# EAGLE board CT_schematic (EAGLE 7.6.0)

Size 100 x 80 mm. Coordinates in mm from the lower left corner, seen from the top.
Outline: 0,0 100,0 100,80 0,80 0,0
Copper layers (1*16): Top 0.035mm / dielectric 1.5mm / Bottom 0.035mm
Design rules "default": minimum track width 10mil, minimum drill 24mil, track to track 8mil, track to pad 8mil, pad to pad 8mil, via to via 8mil, smd to smd 8mil, copper to edge 40mil, drill to drill 8mil, minimum pad ring 10mil, minimum via ring 8mil, stop-mask expansion 4mil, vias tented up to drill 0mil, thermal gap 10mil

## Footprints (pad centres in the part's own frame; a part is rotated, then mirrored left to right if it is on the bottom)
C0603 = smd 0.8 x 0.8: 1 -0.762,0; 2 0.762,0
C0402 = smd 0.5 x 0.5: 1 -0.508,0; 2 0.508,0
C0805 = smd 1.2 x 1.3: 1 -1.016,0; 2 1.016,0
C1206 = smd 1.3 x 1.6: 1 -1.524,0; 2 1.524,0
L0603 = smd 0.8 x 0.8: 1 -0.762,0; 2 0.762,0
L1210 = smd 1.2 x 2.5: 1 -1.524,0; 2 1.524,0
L0805 = smd 1.2 x 1.3: 1 -1.016,0; 2 1.016,0
R0603 = smd 0.8 x 0.8: 1 -0.762,0; 2 0.762,0
LQFP48 = smd 0.3 x 1.2: 1 -2.75,-4.25; 2 -2.25,-4.25; 3 -1.75,-4.25; 4 -1.25,-4.25; 5 -0.75,-4.25; 6 -0.25,-4.25; 7 0.25,-4.25; 8 0.75,-4.25; 9 1.25,-4.25; 10 1.75,-4.25; 11 2.25,-4.25; 12 2.75,-4.25; 25 2.75,4.25; 26 2.25,4.25; 27 1.75,4.25; 28 1.25,4.25; 29 0.75,4.25; 30 0.25,4.25; 31 -0.25,4.25; 32 -0.75,4.25; 33 -1.25,4.25; 34 -1.75,4.25; 35 -2.25,4.25; 36 -2.75,4.25 | smd 1.2 x 0.3: 13 4.25,-2.75; 14 4.25,-2.25; 15 4.25,-1.75; 16 4.25,-1.25; 17 4.25,-0.75; 18 4.25,-0.25; 19 4.25,0.25; 20 4.25,0.75; 21 4.25,1.25; 22 4.25,1.75; 23 4.25,2.25; 24 4.25,2.75; 37 -4.25,2.75; 38 -4.25,2.25; 39 -4.25,1.75; 40 -4.25,1.25; 41 -4.25,0.75; 42 -4.25,0.25; 43 -4.25,-0.25; 44 -4.25,-0.75; 45 -4.25,-1.25; 46 -4.25,-1.75; 47 -4.25,-2.25; 48 -4.25,-2.75
SOIC-8 = smd 1.6 x 0.6: 1 -2.7,1.905 | smd 1.55 x 0.6: 2 -2.7,0.635; 3 -2.7,-0.635; 4 -2.7,-1.905; 5 2.7,-1.905; 6 2.7,-0.635; 7 2.7,0.635; 8 2.7,1.905
SSOP-20 = smd 1.651 x 0.432: 1 -3.48,2.925; 2 -3.48,2.275; 3 -3.48,1.625; 4 -3.48,0.975; 5 -3.48,0.325; 6 -3.48,-0.325; 7 -3.48,-0.975; 8 -3.48,-1.625; 9 -3.48,-2.275; 10 -3.48,-2.925; 11 3.48,-2.925; 12 3.48,-2.275; 13 3.48,-1.625; 14 3.48,-0.975; 15 3.48,-0.325; 16 3.48,0.325; 17 3.48,0.975; 18 3.48,1.625; 19 3.48,2.275; 20 3.48,2.925
HTSS-105-01-G-D = drill 1 pad 1.8 square: 1 0,0 | drill 1 pad 1.8: 2 0,2.54; 3 2.54,0; 4 2.54,2.54; 5 5.08,0; 6 5.08,2.54; 7 7.62,0; 8 7.62,2.54; 9 10.16,0; 10 10.16,2.54
FCI_10118193-0001LF = smd 0.4 x 1.35: 1 -1.3,2.675; 2 -0.65,2.675; 3 0,2.675; 4 0.65,2.675; 5 1.3,2.675 | smd 1.6 x 1.4: 6 -3.2,2.45; 7 3.2,2.45 | smd 1.9 x 1.9: 8 -1.2,0; 9 1.2,0 | hole 0.5: -3.3,0; 3.3,0
SOT143B = smd 1 x 0.7: 1 -0.75,-1 | smd 0.6 x 0.7: 2 0.95,-1; 3 0.95,1; 4 -0.95,1
ABLS-25.000MHZ-B2F-T = smd 5.6 x 2.8: 1 -3.81,0; 2 5.69,0
ASEK = smd 1.4 x 1: 1 -1.1,-0.8; 2 1.1,-0.8; 3 1.1,0.8; 4 -1.1,0.8
TSOT-23-5 = smd 1.3 x 0.62: 1 -1.31,0.95; 2 -1.31,0; 3 -1.31,-0.95; 4 1.31,-0.95; 5 1.31,0.95
DFN8_2X3MC = smd 0.813 x 0.305: 1 -1.398,0.75; 2 -1.398,0.25; 3 -1.398,-0.25; 4 -1.398,-0.75; 5 1.398,-0.75; 6 1.398,-0.25; 7 1.398,0.25; 8 1.398,0.75 | smd 1.753 x 1.549: 9 0,0
JST-2-SMD = smd 1 x 4.6: 1 -1,-3.7; 2 1,-3.7 | smd 1.6 x 3.4: NC1 -3.4,1.5; NC2 3.4,1.5
SON-6 = smd 0.55 x 0.3: 1 -0.355,0.5 | smd 0.52 x 0.3: 2 -0.37,0; 3 -0.37,-0.5; 4 0.37,-0.5; 5 0.37,0; 6 0.37,0.5
SW_4-1437565-2 = smd 1.4 x 2.1: 1 -2.23,4.55; 2 -2.23,-4.55; 3 2.23,4.55; 4 2.23,-4.55
LGM67K-G1J2-24-Z = smd 0.8 x 1.4: A -2,0; C 0,0
NC7SZ125M5X = smd 1.3 x 0.7: 1 -1.3,0.95; 2 -1.3,0; 3 -1.3,-0.95; 4 1.3,-0.95; 5 1.3,0.95

## Placement (x,y rotation side)
C1  1e-06  [C0603]  -48.26,54.61 0 top  (outside the outline)
C2  1e-07  [C0603]  -52.07,54.61 0 top  (outside the outline)
C3  1e-07  [C0603]  -55.88,54.61 0 top  (outside the outline)
C4  1e-07  [C0603]  -59.69,54.61 0 top  (outside the outline)
C5  1e-07  [C0603]  -63.5,54.61 0 top  (outside the outline)
C6  1e-07  [C0603]  -15.24,59.69 0 top  (outside the outline)
C7  4.7e-06  [C0603]  -44.45,54.61 0 top  (outside the outline)
C8  1e-08  [C0603]  -19.05,59.69 0 top  (outside the outline)
C9  1e-06  [C0603]  -22.86,59.69 0 top  (outside the outline)
C10  1e-11  [C0402]  -15.24,64.77 0 top  (outside the outline)
C11  1e-11  [C0402]  -19.05,64.77 0 top  (outside the outline)
C12  1e-08  [C0402]  -22.86,64.77 0 top  (outside the outline)
C13  1e-08  [C0402]  -26.67,64.77 0 top  (outside the outline)
C14  1e-06  [C0603]  -26.67,59.69 0 top  (outside the outline)
C15  1e-06  [C0603]  -30.48,59.69 0 top  (outside the outline)
C16  1e-06  [C0603]  -34.29,59.69 0 top  (outside the outline)
C17  4.7e-06  [C0805]  -21.59,43.18 0 top  (outside the outline)
C18  1e-08  [C0402]  -30.48,64.77 0 top  (outside the outline)
C19  1e-08  [C0402]  -34.29,64.77 0 top  (outside the outline)
C20  1e-05  [C0805]  -26.67,43.18 0 top  (outside the outline)
C21  1e-05  [C0805]  -31.75,43.18 0 top  (outside the outline)
C22  1e-07  [C0402]  -38.1,64.77 0 top  (outside the outline)
C23  1e-05  [C1206]  -55.88,35.56 0 top  (outside the outline)
C24  1e-05  [C1206]  -62.23,35.56 0 top  (outside the outline)
C25  1e-08  [C0402]  -41.91,64.77 0 top  (outside the outline)
F1  240.0  [L0603]  -38.1,59.69 0 top  (outside the outline)
I1  1.5e-05  [L1210]  -49.53,35.56 0 top  (outside the outline)
I2  2.2e-06  [L0805]  -36.83,43.18 0 top  (outside the outline)
R1  10000.0  [R0603]  -30.48,49.53 0 top  (outside the outline)
R2  1000.0  [R0603]  -41.91,59.69 0 top  (outside the outline)
R3  1600.5  [R0603]  -45.72,59.69 0 top  (outside the outline)
R4  4700.0  [R0603]  -49.53,59.69 0 top  (outside the outline)
R5  2200.0  [R0603]  -53.34,59.69 0 top  (outside the outline)
R6  2200.0  [R0603]  -57.15,59.69 0 top  (outside the outline)
R7  10000.0  [R0603]  -35.56,49.53 0 top  (outside the outline)
R8  10000.0  [R0603]  -40.64,49.53 0 top  (outside the outline)
R9  10000.0  [R0603]  -45.72,49.53 0 top  (outside the outline)
R10  10000.0  [R0603]  -50.8,49.53 0 top  (outside the outline)
R11  10000.0  [R0603]  -55.88,49.53 0 top  (outside the outline)
R12  10000.0  [R0603]  -60.96,49.53 0 top  (outside the outline)
R13  10000.0  [R0603]  -66.04,49.53 0 top  (outside the outline)
R14  100000.0  [R0603]  -54.61,43.18 0 top  (outside the outline)
R15  100000.0  [R0603]  -59.69,43.18 0 top  (outside the outline)
R16  100000.0  [R0603]  -64.77,43.18 0 top  (outside the outline)
R17  10000.0  [R0603]  -15.24,54.61 0 top  (outside the outline)
R18  10000.0  [R0603]  -20.32,54.61 0 top  (outside the outline)
R19  10000.0  [R0603]  -25.4,54.61 0 top  (outside the outline)
R20  220000.0  [R0603]  -15.24,49.53 0 top  (outside the outline)
R21  1000000.0  [R0603]  -49.53,43.18 0 top  (outside the outline)
R22  10000.0  [R0603]  -30.48,54.61 0 top  (outside the outline)
R23  10000.0  [R0603]  -35.56,54.61 0 top  (outside the outline)
R24  9100.0  [R0603]  -60.96,59.69 0 top  (outside the outline)
R25  680000.0  [R0603]  -20.32,49.53 0 top  (outside the outline)
R26  120000.0  [R0603]  -25.4,49.53 0 top  (outside the outline)
R27  2000.0  [R0603]  -64.77,59.69 0 top  (outside the outline)
R28  10000.0  [R0603]  -40.64,54.61 0 top  (outside the outline)
U1  STM32F302C8T7  [LQFP48]  -58.42,5.08 0 top  (outside the outline)
U2  AT25128B-SSHL-T  [SOIC-8]  -43.18,17.78 0 top  (outside the outline)
U3  AT25512N-SH-T  [SOIC-8]  -22.86,27.94 0 top  (outside the outline)
U4  MAX3218EAP+T  [SSOP-20]  -33.02,26.67 0 top  (outside the outline)
U5  HTSS-105-01-G-D  [HTSS-105-01-G-D]  -27.94,16.51 0 top  (outside the outline)
U6  24AA1025T-I/SN  [SOIC-8]  -58.42,17.78 0 top  (outside the outline)
U7  10118193-0001LF  [FCI_10118193-0001LF]  -43.18,26.67 0 top  (outside the outline)
U8  prtr5v0u2ax  [SOT143B]  -54.61,64.77 0 top  (outside the outline)
U9  ABLS-25.000MHZ-B2F-T  [ABLS-25.000MHZ-B2F-T]  -26.67,36.83 0 top  (outside the outline)
U10  ASEK-32.768KHz-ECST  [ASEK]  -64.77,26.67 0 top  (outside the outline)
U11  ltc3406es5  [TSOT-23-5]  -41.91,43.18 0 top  (outside the outline)
U12  MCP73831T-2ACI/MC  [DFN8_2X3MC]  -64.77,63.5 0 top  (outside the outline)
U13  S2B-PH-SM4-TB(LF)(SN)  [JST-2-SMD]  -41.91,6.35 0 top  (outside the outline)
U14  TPS3895ADRYR  [SON-6]  -58.42,63.5 0 top  (outside the outline)
U15  4-1437565-2  [SW_4-1437565-2]  -27.94,6.35 0 top  (outside the outline)
U16  Q65110A2395  [LGM67K-G1J2-24-Z]  -38.1,35.56 0 top  (outside the outline)
U17  nc7sz125m5x  [NC7SZ125M5X]  -15.24,43.18 0 top  (outside the outline)

## Library data of the parts
C1-C25 F1 I1 I2 R1-R28 U1-U17 = circuit_tree

## Nets
CLK_CRYSTAL_U1_5: C10.1 U1.5 U9.1
CLK_CRYSTAL_U1_6: C11.1 U1.6 U9.2
CLK_U1_3: U1.3 U10.3
GND: C1.2 C2.2 C3.2 C4.2 C5.2 C6.2 C7.2 C8.2 C9.2 C10.2 C11.2 C12.2 C13.2 C14.2 C15.2 C16.2 C18.2 C19.2 C20.2 C21.1 C21.2 C22.2 C23.2 C24.2 C25.2 R2.2 R7.2 R20.2 R24.2 R26.2 R27.2 U1.8 U1.23 U1.35 U1.47 U2.4 U3.4 U4.5 U4.17 U4.20 U5.9 U6.4 U7.5 U7.6 U7.7 U7.8 U7.9 U8.1 U10.2 U11.2 U12.6 U12.9 U13.2 U14.2 U16.C U17.1 U17.3
INPUT_USBPOWER_5V: C23.1 R28.2 U7.1 U8.4 U12.1 U12.2
NET_U1_7: R4.1 U1.7 U17.4
NET_U1_9: C8.1 C9.1 F1.1 U1.9
NET_U1_37: R6.1 U1.37 U6.5
NET_U1_38: R5.1 U1.38 U6.6
NET_U1_44: R7.1 U1.44
NET_U1_45: R3.1 U1.45 U16.A
NET_U1_46: R1.1 U1.46 U15.3 U15.4
NET_U2_3: R8.1 U2.3
NET_U2_7: R10.1 U2.7
NET_U3_3: R11.1 U3.3
NET_U3_7: R13.1 U3.7
NET_U4_1: I1.1 U4.1
NET_U4_2: R14.1 U4.2
NET_U4_3: R15.1 U4.3
NET_U4_4: R16.1 U4.4
NET_U4_15: C16.1 U4.15
NET_U4_16: C17.2 U4.16
NET_U4_18: C17.1 U4.18
NET_U4_19: C15.1 U4.19
NET_U5_3: U4.12 U5.3
NET_U5_4: U4.11 U5.4
NET_U5_5: U4.14 U5.5
NET_U5_6: U4.13 U5.6
NET_U6_1: R18.1 U6.1
NET_U6_2: R19.1 U6.2
NET_U6_3: R17.1 U6.3
NET_U11_1: U11.1
NET_U11_3: I2.1 U11.3
NET_U11_5: R20.1 R21.1 U11.5
NET_U11_ATNET_3: I2.2 R21.2
NET_U12_5: R28.1 U12.5
NET_U12_8: R27.1 U12.8
NET_U14_1: R23.1 R24.1 U14.1
NET_U14_3: R25.2 R26.1 U14.3
NET_U14_4: R22.1 U14.4 U17.2
NET_U15_1: R2.1 U15.1 U15.2
PROC_SPI2_MISO: U1.27 U3.2
PROC_SPI2_MOSI: U1.28 U3.5
PROC_SPI2_NSS: R12.1 U1.25 U3.1
PROC_SPI2_SCK: U1.26 U3.6
PROC_SPI3_MISO: U1.40 U2.2
PROC_SPI3_MOSI: U1.41 U2.5
PROC_SPI3_NSS: R9.1 U1.14 U2.1
PROC_SPI3_SCK: U1.39 U2.6
PROC_USART2_CTS: U1.10 U4.8
PROC_USART2_RTS: U1.11 U4.10
PROC_USART2_RX: U1.13 U4.9
PROC_USART2_TX: U1.12 U4.7
PROC_USB_DM: U1.32 U7.2 U8.3
PROC_USB_DP: U1.33 U7.3 U8.2
VCC_S1_3V7: C20.1 C24.1 U11.4 U12.3 U12.4 U13.1
VCC_TIER1_3V3: C1.1 C2.1 C3.1 C4.1 C5.1 C6.1 C7.1 C12.1 C13.1 C14.1 C18.1 C19.1 C21.2 C22.1 C25.1 F1.2 I1.2 I2.2 R1.2 R3.2 R4.2 R5.2 R6.2 R8.2 R9.2 R10.2 R11.2 R12.2 R13.2 R14.2 R15.2 R16.2 R17.2 R18.2 R19.2 R21.2 R22.2 R23.2 R25.1 U1.1 U1.24 U1.36 U1.48 U2.8 U3.8 U4.6 U6.7 U6.8 U10.4 U14.6 U17.5

## Tracks (layer width: path | path; a pad name or v marks a point on that pad's centre or on a via)
CLK_CRYSTAL_U1_5  (2 unrouted)
CLK_CRYSTAL_U1_6  (2 unrouted)
CLK_U1_3  (1 unrouted)
GND  (56 unrouted)
INPUT_USBPOWER_5V  (5 unrouted)
NET_U1_7  (2 unrouted)
NET_U1_9  (3 unrouted)
NET_U1_37  (2 unrouted)
NET_U1_38  (2 unrouted)
NET_U1_44  (1 unrouted)
NET_U1_45  (2 unrouted)
NET_U1_46  (3 unrouted)
NET_U2_3  (1 unrouted)
NET_U2_7  (1 unrouted)
NET_U3_3  (1 unrouted)
NET_U3_7  (1 unrouted)
NET_U4_1  (1 unrouted)
NET_U4_2  (1 unrouted)
NET_U4_3  (1 unrouted)
NET_U4_4  (1 unrouted)
NET_U4_15  (1 unrouted)
NET_U4_16  (1 unrouted)
NET_U4_18  (1 unrouted)
NET_U4_19  (1 unrouted)
NET_U5_3  (1 unrouted)
NET_U5_4  (1 unrouted)
NET_U5_5  (1 unrouted)
NET_U5_6  (1 unrouted)
NET_U6_1  (1 unrouted)
NET_U6_2  (1 unrouted)
NET_U6_3  (1 unrouted)
NET_U11_3  (1 unrouted)
NET_U11_5  (2 unrouted)
NET_U11_ATNET_3  (1 unrouted)
NET_U12_5  (1 unrouted)
NET_U12_8  (1 unrouted)
NET_U14_1  (2 unrouted)
NET_U14_3  (2 unrouted)
NET_U14_4  (2 unrouted)
NET_U15_1  (2 unrouted)
PROC_SPI2_MISO  (1 unrouted)
PROC_SPI2_MOSI  (1 unrouted)
PROC_SPI2_NSS  (2 unrouted)
PROC_SPI2_SCK  (1 unrouted)
PROC_SPI3_MISO  (1 unrouted)
PROC_SPI3_MOSI  (1 unrouted)
PROC_SPI3_NSS  (2 unrouted)
PROC_SPI3_SCK  (1 unrouted)
PROC_USART2_CTS  (1 unrouted)
PROC_USART2_RTS  (1 unrouted)
PROC_USART2_RX  (1 unrouted)
PROC_USART2_TX  (1 unrouted)
PROC_USB_DM  (2 unrouted)
PROC_USB_DP  (2 unrouted)
VCC_S1_3V7  (5 unrouted)
VCC_TIER1_3V3  (50 unrouted)